# Altium PCB EFR32xG22_ESL-Node_Ref-Des.PcbDoc (part 3 of 3)
Units mm, origin at the board's own origin, x right, y up, seen from the top; angles counter-clockwise.
Board outline 101.83 x 52.07 mm, 2 copper layers (Top, Bottom), stack 0.78 mm thick; 179 components, 91 nets, 473 pads, 1291 vias.
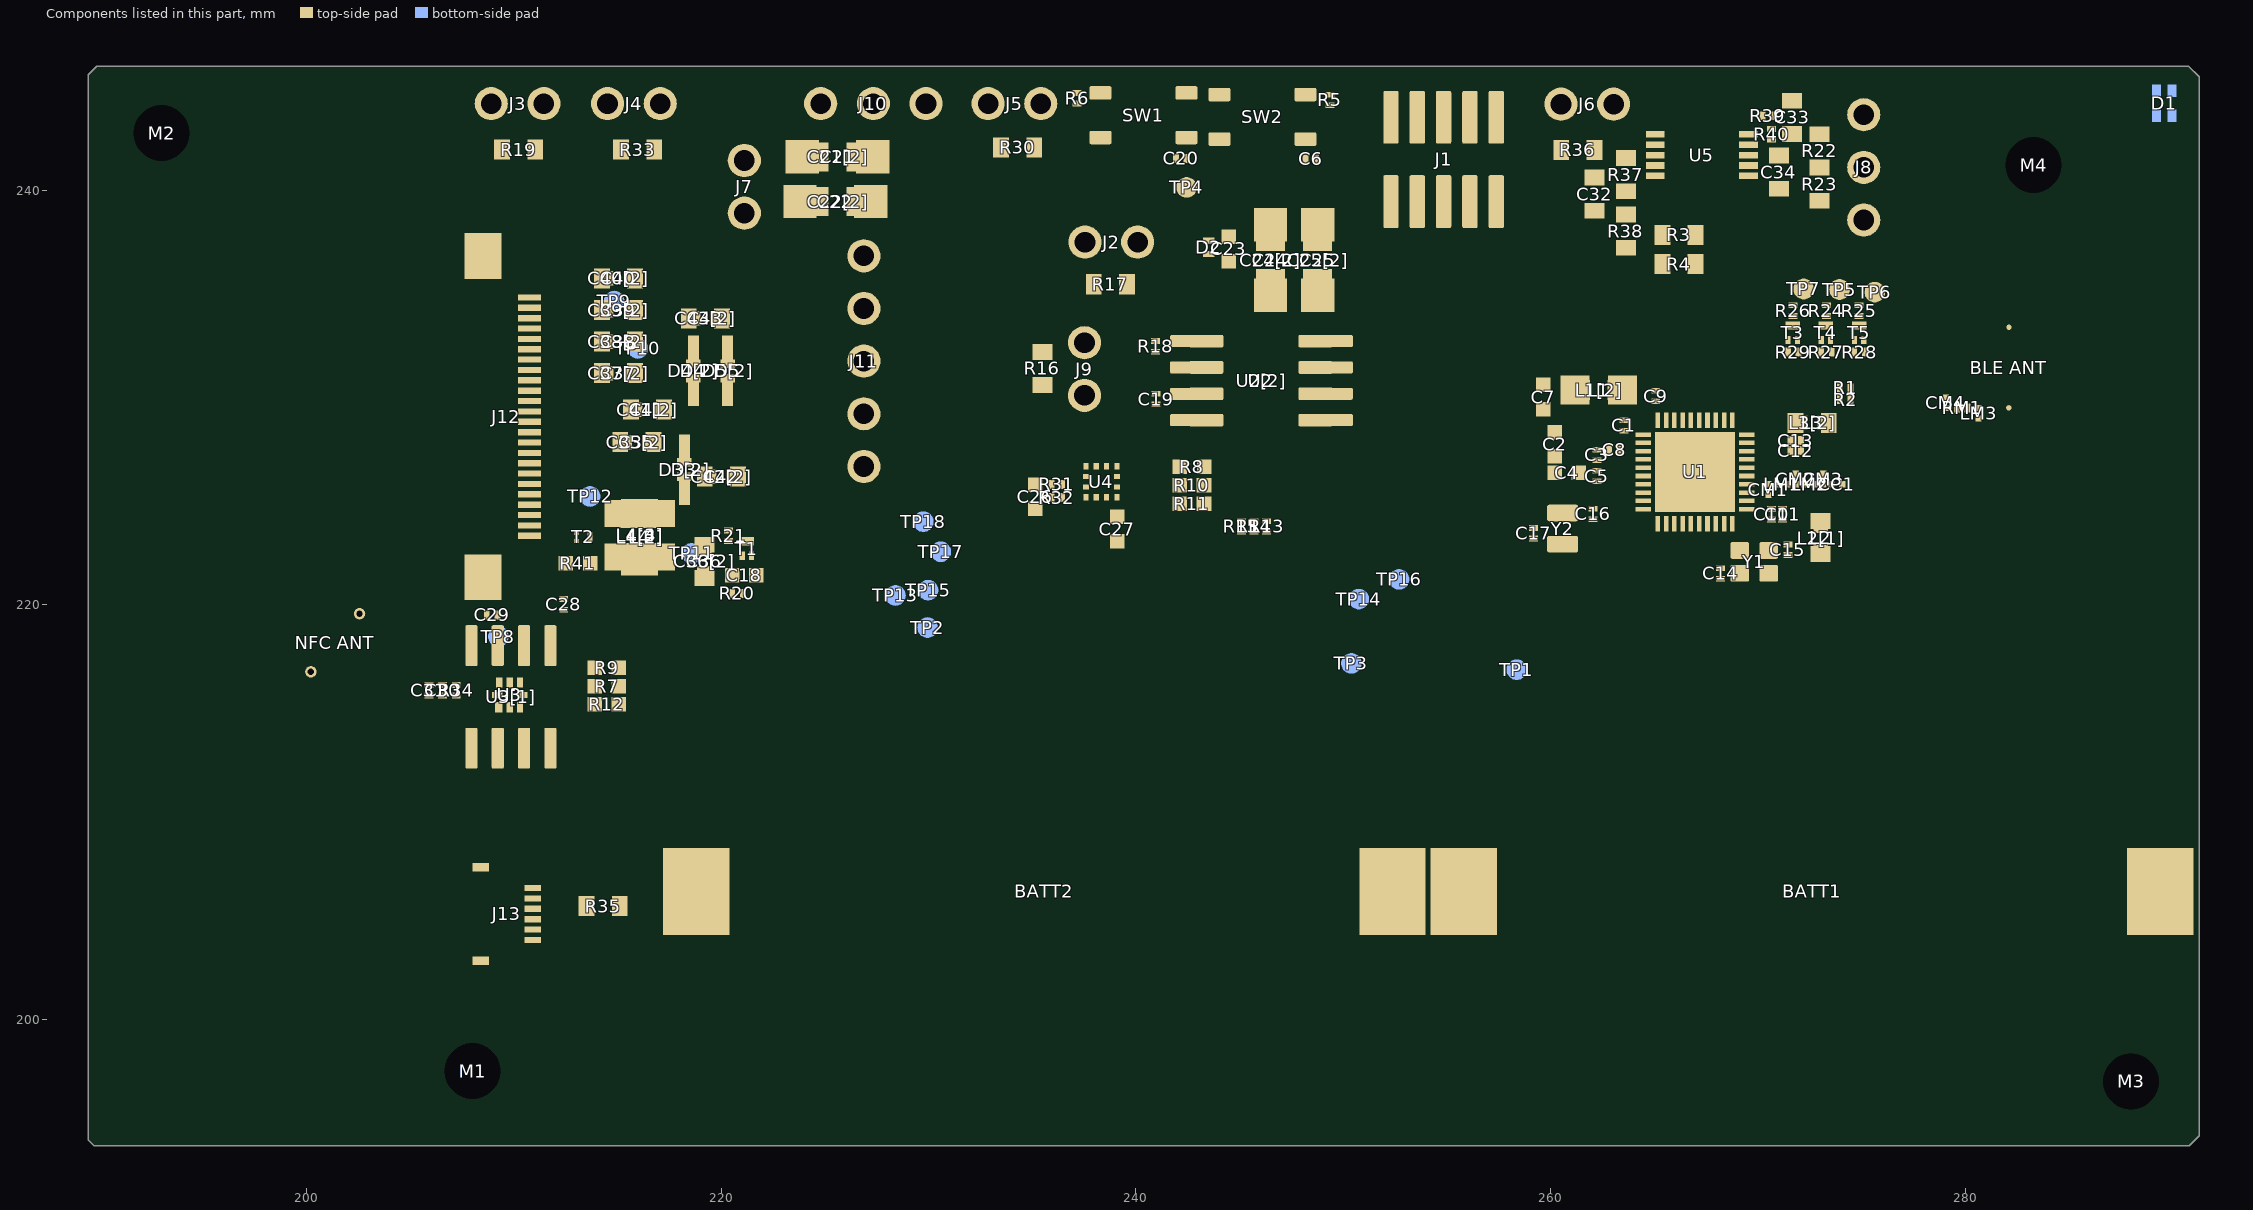
[diagram p3: the components of this part, seen from the top]

## Other copper
Top:
  rectangle net GND: 218.211,203.2 219.304,209.093
  rectangle net GND: 216.103,205.689 221.361,206.781
  rectangle net GND: 281.457,232.656 281.661,234.137
  rectangle net GND: 281.229,232.867 281.813,233.888
  pour cut-out: 237.736,226.525 238.93,226.525 238.93,225.331 237.736,225.331
  region net "NetBLE ANT_1": 281.124,229.594 281.526,229.997 281.711,229.997 281.711,229.526
  pour cut-out: 270.866,226.06 272.237,226.06 272.237,227.152 270.866,227.152
  pour cut-out: 250.317,208.636 250.317,203.606 257.861,203.606 257.861,208.636
  region net "NetBLE ANT_1": 281.124,229.384 281.526,228.981 281.711,228.981 281.711,229.489

## Silkscreen, mask and mechanical layers (free items; w line width, h text height)
Top Overlay:
  text "VBOOST_LED" at 276.86,244.526 h0.6
  text "BOOSTER" at 265.303,243.637 h0.5
  text "VEXT" at 221.132,243.586 h0.6
  text "VBAT" at 229.108,242.062 h0.5
  text "VEXT" at 217.703,241.427 h0.5
  text "SUPPLY" at 217.322,240.716 h0.4
  text "RESET" at 244.932,240.055 h0.5
  text "XLM" at 233.426,239.751 h0.6
  text "EPD" at 209.423,239.547 h0.6
  text "NFC" at 215.29,239.42 h0.6
  text "FLASH" at 238.557,239.065 h0.5
  text "PTI_DCLK" at 241.376,238.887 h0.5
  text "GND" at 217.932,238.582 h0.6
  text "VCC" at 276.936,238.049 h0.6
  text "GND" at 228.6,236.728 h0.6
  text "R" at 272.034,235.966 h0.5
  text "G" at 273.787,235.941 h0.5
  text "B" at 275.488,235.89 h0.5
  text "VCC" at 228.549,234.036 h0.6
  text "I2C PULL-UP" at 234.848,234.036 h0.5
  text "NFC-FDN_" at 228.727,231.826 h0.5
  text "XL-INT1" at 228.727,231.013 h0.5
  text "I2C_SCL" at 228.498,229.133 h0.6
  text "I2C_SDA" at 228.524,226.568 h0.6
  text "EFR32" at 264.973,222.428 h0.6
  text "A02" at 209.677,194.361 h1.52
Bottom Overlay:
  text "TP9" at 215.595,235.483 h0.6
  text "TP10" at 216.865,230.962 h0.6
  text "TP12" at 212.827,224.993 h0.6
  text "EPD_MOSI" at 235.026,224.003 h0.6
  text "EPD_SCLK" at 235.941,222.225 h0.6
  text "EPD_VCC" at 217.678,222.174 h0.6
  text "EPD_CSN" at 254.787,221.996 h0.6
  text "EPD_DC" at 234.163,220.37 h0.6
  text "EPD_BUSYN" at 227.635,220.243 h0.6
  text "EPD_RESETN" at 249.834,219.913 h0.6
  text "EPD_POWERN" at 236.677,218.491 h0.6
  text "TP8" at 210.007,217.018 h0.6
  text "NFC-FDN_XL-INT1" at 251.079,215.849 h0.6
  text "RFVDD" at 259.74,215.417 h0.6
  text "NFC ANT" at 196.037,213.766 h1.02 r90
Dimension:
  lines w0.254: 185.144,195.479 185.649,193.954 ; 185.239,244.4 185.75,245.923 ; 185.395,193.955 185.903,193.954 ; 185.496,245.923 186.004,245.922 ; 185.684,212.042 185.649,193.954 ; 185.715,227.836 185.75,245.923 ; 186.16,195.477 185.649,193.954 ; 186.255,244.398 185.75,245.923 ; 189.433,248.209 189.433,248.717 ; 190.957,247.954 189.433,248.463 ; 190.957,248.97 189.433,248.463 ; 231.879,248.442 189.433,248.463 ; 248.943,248.433 291.389,248.412 ; 289.865,247.905 291.389,248.412 ; 289.865,248.921 291.389,248.412 ; 291.389,248.158 291.389,248.666 ; 189.459,194.183 189.738,193.904 290.805,193.904 291.287,194.386 291.287,245.466 290.779,245.974 269.519,245.974 189.865,245.974 189.459,245.567 189.459,194.183
  text "101.956 (mm)" at 232.133,247.527 h1.52 r359.97
  text "51.968 (mm)" at 186.599,212.294 h1.52 r89.89

## Text inside footprints (layer, text, board x,y; h text height)
D2: Top Overlay "A" at 242.316,236.703 h0.5 r270; Top Overlay "C" at 242.392,238.201 h0.5 r270
D3: Top Overlay "C" at 218.846,227.914 h0.3; Top Overlay "A" at 218.816,224.901 h0.3
D3[2]: Top Overlay "A" at 219.177,225.349 h0.3 r270; Top Overlay "C" at 219.151,227.178 h0.3 r270
D4: Top Overlay "A" at 218.013,233.054 h0.3 r180; Top Overlay "C" at 218.084,229.641 h0.3 r180
D4[2]: Top Overlay "C" at 218.135,229.845 h0.3 r90; Top Overlay "A" at 218.008,232.41 h0.3 r90
D5: Top Overlay "C" at 220.955,232.867 h0.3; Top Overlay "A" at 220.904,229.387 h0.3
D5[2]: Top Overlay "A" at 220.878,230.048 h0.3 r270; Top Overlay "C" at 220.934,232.673 h0.3 r270
J1: Top Overlay "1" at 251.028,238.735 h1.5
J12: Top Overlay "24" at 210.21,236.83 h1.5 r270; Top Overlay "1" at 210.109,222.783 h1.5 r270
J13: Top Overlay "6" at 210.337,207.518 h1.5 r270; Top Overlay "1" at 210.363,203.149 h1.5 r270